# Altium PCB PCB1_Nueva.PcbDoc
Units mil, origin at the board's own origin, x right, y up, seen from the top; angles counter-clockwise.
Board outline 3315 x 2025 mil, 2 copper layers (Top Layer, Bottom Layer); 50 components, 60 nets, 235 pads, 50 vias.
Unrouted connection lines stored in the file: 1.
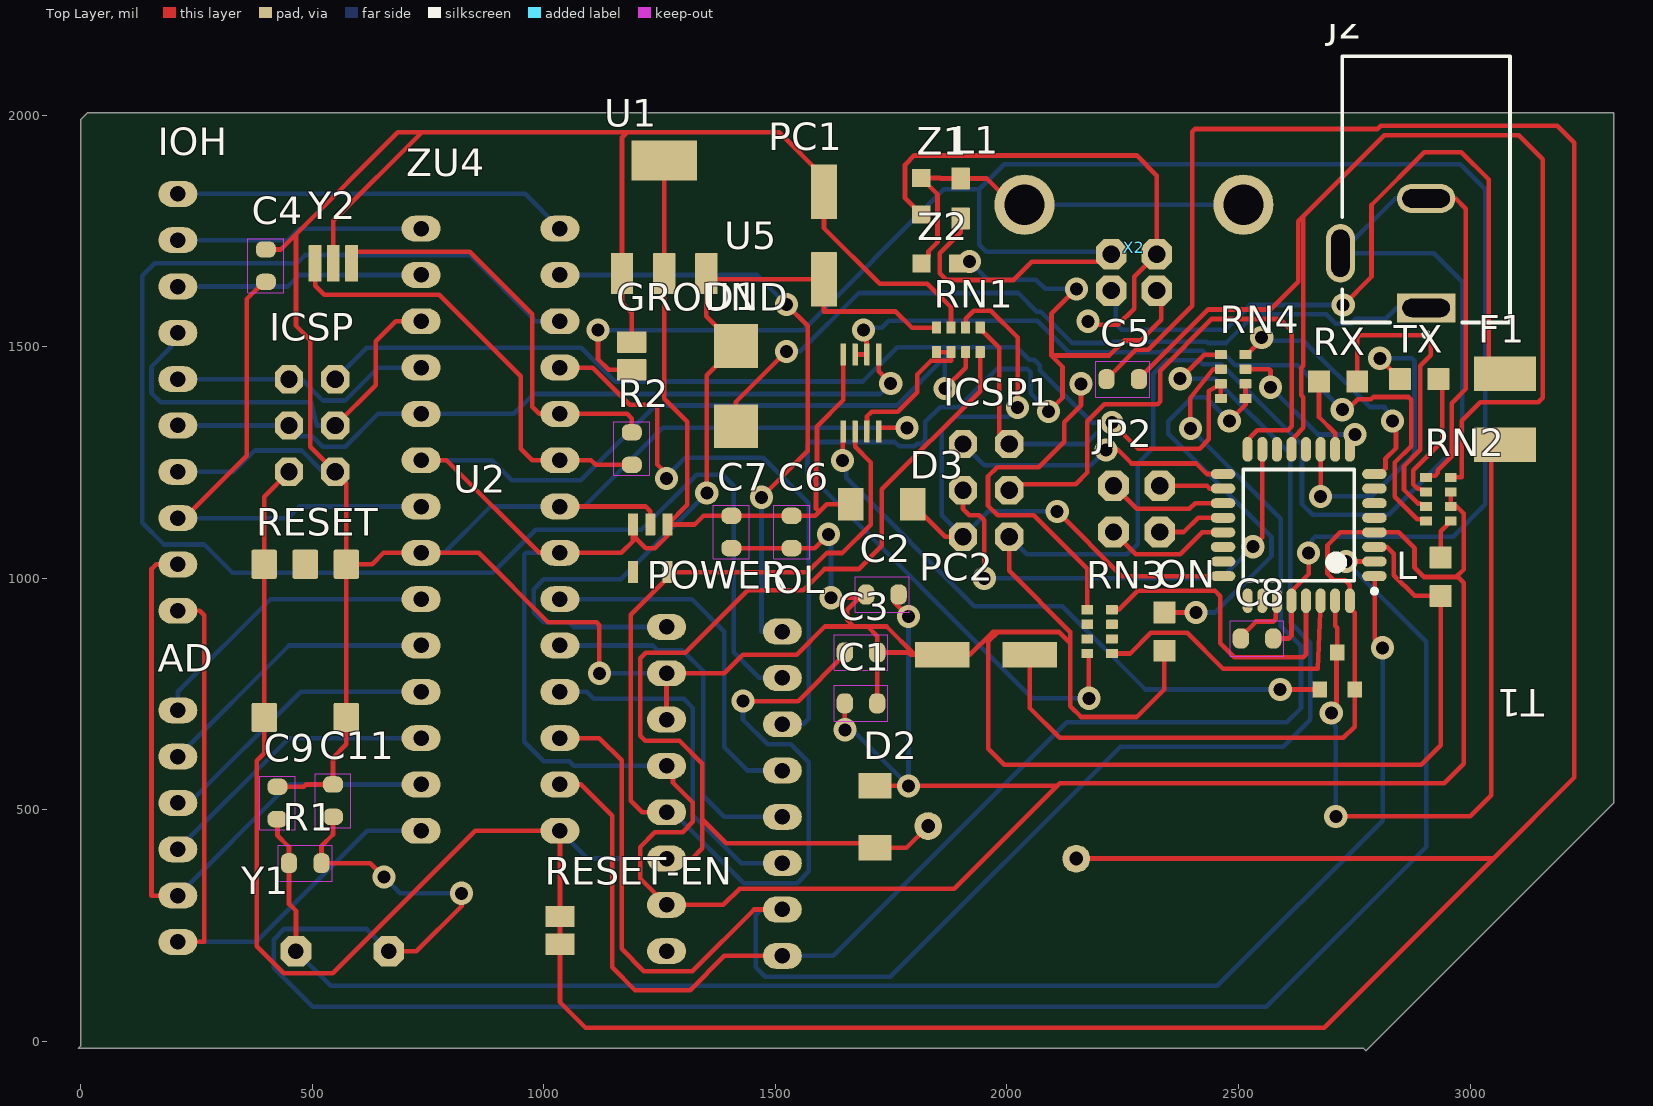
[diagram p0: Top Layer view]
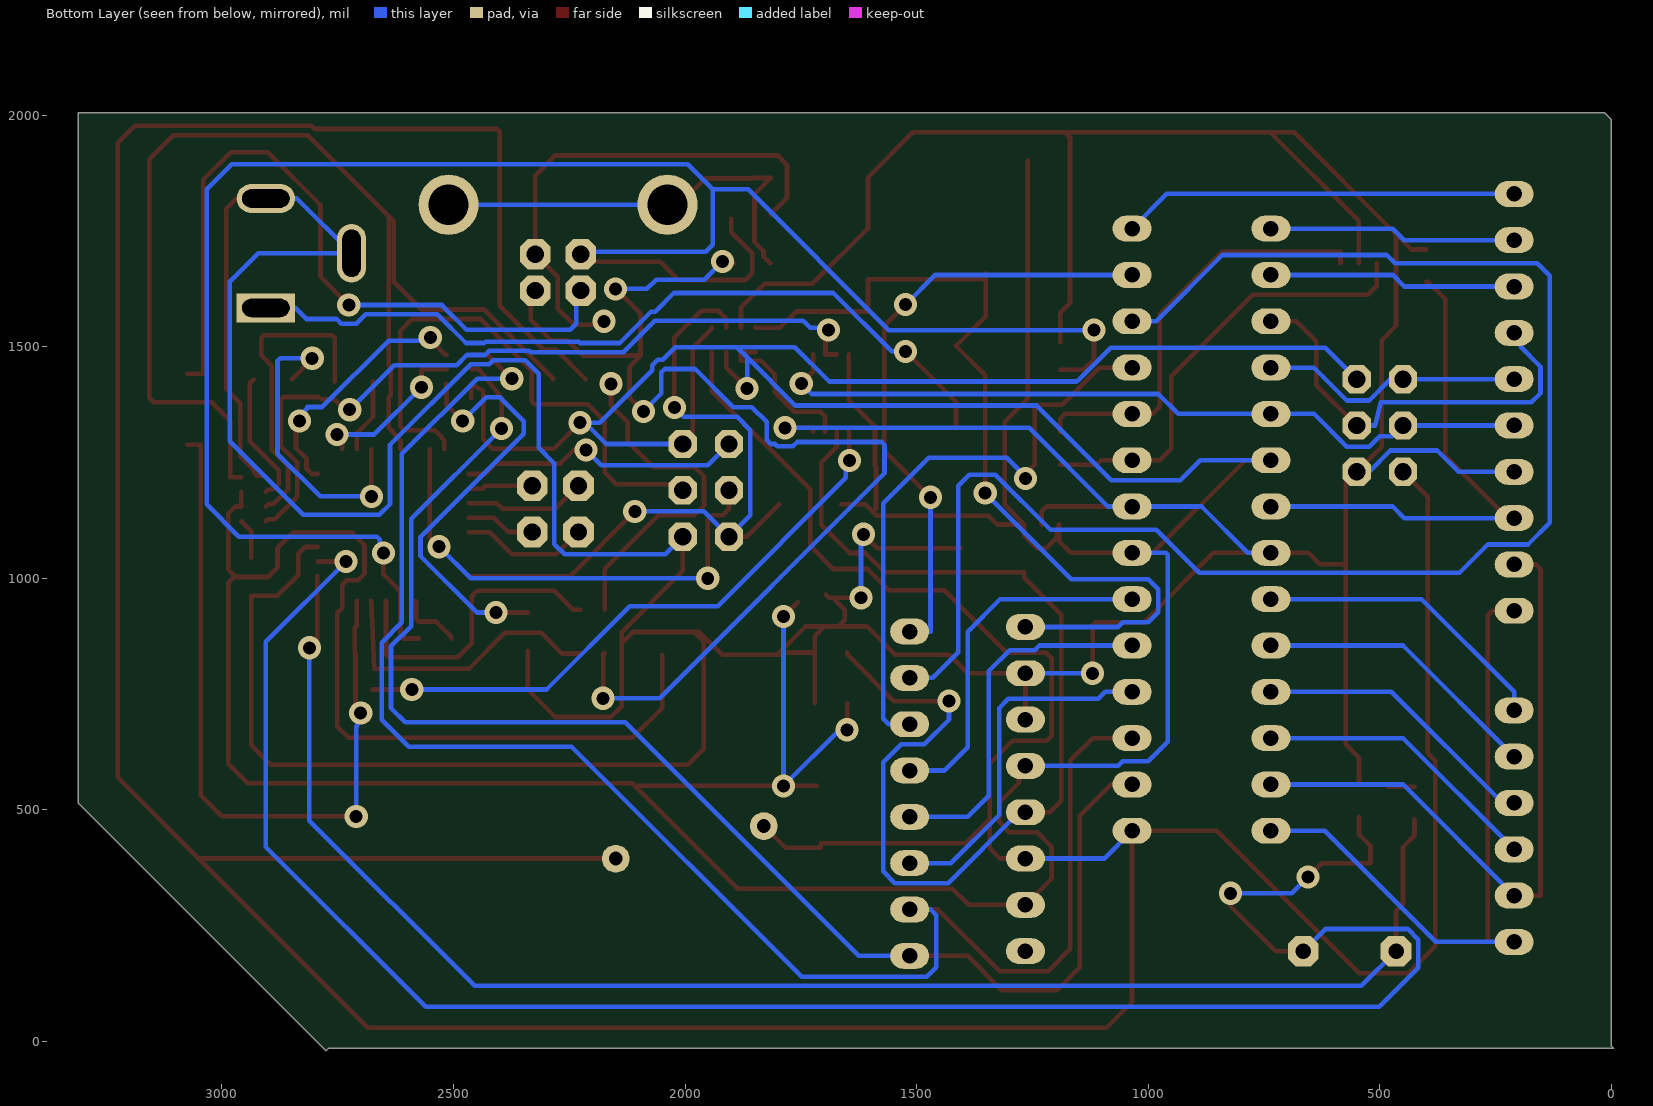
[diagram p1: Bottom Layer view, seen from below]

## Layer stack, top to bottom
Top Solder: solder mask 0.4, Solder Resist, Dk 3.5
Top Layer: signal copper 1.4
Dielectric 1: dielectric 12.6, FR-4, Dk 4.8
Bottom Layer: signal copper 1.4
Bottom Solder: solder mask 0.4, Solder Resist, Dk 3.5

## Board outline
0,-10 0,1990 15,2005 3310,2005 3310,515 2775,-20 2770,-15 -5,-15

## Design rules (kind name [scope] priority, off if disabled: settings)
Clearance [All] p1: gap=10 ignorepadtopadclearanceinfootprint=FALSE
PolygonConnect [All] p1: connectstyle=Relief reliefconductorwidth=10 reliefentries=4 polygonreliefangle="90 Angle" airgapwidth=10
RoutingVias [All] p1: holewidth=28 width=50 viastyle="Through Hole" minholewidth=28 minwidth=50 maxholewidth=28 maxwidth=50
SolderMaskExpansion [All] p1: expansion=0 istentingtop=FALSE
SupplyNets "Schematic Supply Nets_1" [InNet('+5V')] p1: voltage=0.000
SupplyNets "Schematic Supply Nets" [InNet('GND')] p2: voltage=0.000
Width [All] p1: maxlimit=10 minlimit=10 preferedwidth=10
30 further rules are at their usual default settings.

## Components (designator, comment, footprint, x,y, rotation, side; value= is the part's Value field where it differs from the comment)
AD "6x1F-H8.5" 1X06 210,465 r270 top
C1 "100n" C0603-ROUND 1685,730 r180 top
C2 "100n" C0603-ROUND 1730.98,965 r0 top
C3 "1u" C0603-ROUND 1685,840 r180 top
C4 "100n" C0603-ROUND 400,1675 r270 top
C5 "100n" C0603-ROUND 2250,1430 r180 top
C6 "100n" C0603-ROUND 1535,1100 r90 top
C7 "100n" C0603-ROUND 1405,1100 r270 top
C8 "1u" C0603-ROUND 2540,870 r0 top
C9 "22p" C0603-ROUND 425,515 r90 top
C11 "22p" C0603-ROUND 545,520 r90 top
D1 "M7" SMB 1415,1415 r270 top
D2 "CD1206-S01575" MINIMELF 1715,485 r270 top
D3 "CD1206-S01575" MINIMELF 1730,1160 r0 top
F1 "MF-MSMF050-2 500mA" L1812 3075,1365 r90 top
GROUND "SJ" SJ 1190,1480 r270 top
ICSP "3x2 M" 2X03 500,1330 r270 top
ICSP1 "3x2 M" 2X03 1955,1190 r270 top
IOH "10x1F-H8.5" 1X10 210,1380 r270 top
IOL "8x1F-H8.5" 1X08 1515,535 r90 top
J2 "PJ-102A" FP-PJ-102A-MFG 2905,1839.69 r0 top
JP2 "2x2 M - NM" 2X02 2280,1150 r180 top
L "YELLOW" CHIP-LED0805 2936.42,1003.37 r180 top
L1 "BLM21" 0805 1900,1820 r90 top
ON "GREEN" CHIP-LED0805 2340,885 r180 top
PC1 "47u" PANASONIC_D 1605,1740 r270 top
PC2 "47u" PANASONIC_D 1955,835 r0 top
POWER "8x1F-H8.5" 1X08 1265,545 r90 top
R1 "1M" R0603-ROUND 485,385 r0 top
R2 "1M" R0603-ROUND 1190,1280 r90 top
RESET "TS42031-160R-TR-7260" TS42 485,865 r270 top
RESET-EN "SJ" SJ 1035,240 r270 top
RN1 "10K" CAY16 1895,1515 r0 top
RN2 "1K" CAY16 2931.57,1170.75 r90 top
RN3 "22R" CAY16 2200,885 r90 top
RN4 "1K" CAY16 2488.43,1435.75 r270 top
RX "YELLOW" CHIP-LED0805 2715,1425 r90 top
T1 "FDN340P" SOT-23 2714,800 r180 top
TX "YELLOW" CHIP-LED0805 2890,1430 r90 top
U1 "NCP1117ST50T3G" SOT223 1260,1780 r0 top
U2 "LP2985-33DBVR" SOT23-DBV 1230,1065 r180 top
U5 "LMV358IDGKR" MSOP08 1685,1400 r0 top
U$1 "DISCLAIMER" DISCLAIMER 8645,-225 r90 top
X2 "USB-B_TH" PN61729 2274.21,1806.69 r180 top
Y1 "16MHz" QS 565,195 r180 top
Y2 "CSTCE16M0V53-R0 16MHZ" RESONATOR 545.63,1680 r180 top
Z1 "CG0603MLC-05E" CT/CN0603 1815,1825 r90 top
Z2 "CG0603MLC-05E" CT/CN0603 1855,1680 r180 top
ZU4 "ATMEGA328P-PU" DIL28-3 885,1105 r90 top
? "ATmega16U2-AU" 32A_L 2630,1115 r180 top

## Footprints (in the part's own frame and the unit in brackets; to place one, negate y for a bottom-side part, rotate by r counter-clockwise, add the part's x,y. Pads: shape width x height; smd on the part's side, far side on the other; paste and mask are expansions set on the pad)
1X06 [mil]
  oval 56x84 / inner round 0 / far side oval 56x84 hole 33.46: 1(-250,0) 2(-150,0) 3(-50,0) 4(50,0) 5(150,0) 6(250,0)
1X08 [mil]
  oval 56x84 / inner round 0 / far side oval 56x84 hole 33.46: 1(-350,0) 2(-250,0) 3(-150,0) 4(-50,0) 5(50,0) 6(150,0) 7(250,0) 8(350,0)
1X10 [mil]
  oval 56x84 / inner round 0 / far side oval 56x84 hole 33.46: 1(-450,0) 2(-350,0) 3(-250,0) 4(-150,0) 5(-50,0) 6(50,0) 7(150,0) 8(250,0) 9(350,0) 10(450,0)
2X02 [mil]
  oct 66x66 / inner round 0 / far side oct 66x66 hole 37.4: 1(-50,-50) 2(-50,50) 3(50,-50) 4(50,50)
2X03 [mil]
  oct 61.02x61.02 / inner round 0 / far side oct 61.02x61.02 hole 37.4: 1(-100,-50) 2(-100,50) 3(0,-50) 4(0,50) 5(100,-50) 6(100,50)
32A_L [mm] "Thin QFP, 32-Leads, Body 7x7mm, Pitch 0.8mm, IPC High Density"
  oval 1.35x0.55 smd: 1(-4.15,2.8) 2(-4.15,2) 3(-4.15,1.2) 4(-4.15,0.4) 5(-4.15,-0.4) 6(-4.15,-1.2) 7(-4.15,-2) 8(-4.15,-2.8) 17(4.15,-2.8) 18(4.15,-2) 19(4.15,-1.2) 20(4.15,-0.4) 21(4.15,0.4) 22(4.15,1.2) 23(4.15,2) 24(4.15,2.8)
  oval 0.55x1.35 smd: 9(-2.8,-4.15) 10(-2,-4.15) 11(-1.2,-4.15) 12(-0.4,-4.15) 13(0.4,-4.15) 14(1.2,-4.15) 15(2,-4.15) 16(2.8,-4.15) 25(2.8,4.15) 26(2,4.15) 27(1.2,4.15) 28(0.4,4.15) 29(-0.4,4.15) 30(-1.2,4.15) 31(-2,4.15) 32(-2.8,4.15)
  silkscreen extent -4.28,-3.05 3.05,3.75, body extent -3.5,-3.5 3.5,3.5, height 1.2
0805 [mm]
  rrect5% 1.2x1 smd: 1(-1.1,0) 2(1.1,0)
C0603-ROUND [mil]
  rrect80% 35.37x43.31 smd: 1(-35,0) 2(35,0)
  Top Layer keep-out lines w2: 57.99,38.7 -57.99,38.7 -57.99,-38.7 57.99,-38.7 57.99,38.7
CAY16 [mm]
  rrect10% 0.5x0.65 smd: 1(-1.2,-0.675) 2(-0.4,-0.675) 3(0.4,-0.675) 4(1.2,-0.675) 5(1.2,0.675) 6(0.4,0.675) 7(-0.4,0.675) 8(-1.2,0.675)
CHIP-LED0805 [mm]
  rrect4% 1.2x1.2 smd: A(0,-1.05) C(0,1.05)
CT/CN0603 [mm]
  rrect5% 1x1 smd: 1(-1,0) 2(1,0)
DIL28-3 [mil]
  oval 56x84 / inner round 0 / far side oval 56x84 hole 33.46: 1(-650,-150) 2(-550,-150) 3(-450,-150) 4(-350,-150) 5(-250,-150) 6(-150,-150) 7(-50,-150) 8(50,-150) 9(150,-150) 10(250,-150) 11(350,-150) 12(450,-150) 13(550,-150) 14(650,-150) 15(650,150) 16(550,150) 17(450,150) 18(350,150) 19(250,150) 20(150,150) 21(50,150) 22(-50,150) 23(-150,150) 24(-250,150) 25(-350,150) 26(-450,150) 27(-550,150) 28(-650,150)
DISCLAIMER [mil]
FP-PJ-102A-MFG [mm]
  rect 3.2x1.6 hole 1 slot 2.6 at 0 deg paste-2539.97 mask+0: 1(0,-6.5)
  rrect100% 3.2x1.6 hole 1 slot 2.6 at 0 deg paste-2539.97 mask+0: 2(0,-0.5)
  rrect100% 1.6x3.2 hole 2.6 slot 1 at 0 deg paste-2539.97 mask+0: 3(-4.7,-3.5)
  silkscreen extent -4.6,-8.07 4.6,7.3, body extent -5.6,-7.4 4.7,7.4, height 0.25
L1812 [mil]
  rrect2% 74.8x133.86 smd: 1(-76.77,0) 2(76.77,0)
MINIMELF [mil]
  rrect3% 55.12x70.87 smd: A(66.93,0) C(-66.93,0)
MSOP08 [mil]
  rrect16% 11.81x47.24 smd: 1(-38.43,-83.19) 2(-12.83,-83.19) 3(12.76,-83.19) 4(38.35,-83.19) 5(38.35,83.15) 6(12.76,83.15) 7(-12.83,83.15) 8(-38.43,83.15)
PANASONIC_D [mm]
  rrect3% 3x1.4 smd: +(2.4,0) -(-2.4,0)
PN61729 [mil]
  oct 66x66 / inner round 0 / far side oct 66x66 hole 37.4: 1(49.21,185.43) 2(-49.21,185.43) 3(-49.21,106.69) 4(49.21,106.69)
  round 129.91 / inner round 0 / far side round 129.91 hole 86.61: P$1(-236.22,0) P$2(236.22,0)
QS [mil]
  oct 66x66 / inner round 0 / far side oct 66x66 hole 33.46: 1(-100,0) 2(100,0)
R0603-ROUND [mil]
  rrect80% 35.37x43.31 smd: 1(-35,0) 2(35,0)
  Top Layer keep-out lines w2: -57.99,-38.7 57.99,-38.7 57.99,38.7 -57.99,38.7 -57.99,-38.7
RESONATOR [mm]
  rrect7% 0.7x2 smd: 1(-1,0) 2(0,0) 3(1,0)
SJ [mil]
  rrect4% 46x63 smd: 1(-30,0) 2(30,0)
SMB [mil]
  rrect2% 94.49x94.49 smd: A(86.61,0) C(-86.61,0)
SOT23-DBV [mil]
  rrect9% 21.65x47.24 smd: 1(-37.4,-51.18) 2(0,-51.18) 3(37.4,-51.18) 4(37.4,51.18) 5(-37.4,51.18)
SOT223 [mil]
  rrect4% 48x88 smd: 1(-91,-122) 2(0,-122) 3(91,-122)
  rrect2% 141.73x86.61 smd: 4(0,122.01)
SOT-23 [mil]
  rrect6% 31x35 smd: 1(1,-40) 2(-37,40) 3(39,40)
TS42 [mil]
  rrect15% 62.99x55.12 smd: 1(-165.35,88.58) 2(165.35,88.58) 3(-165.35,-88.58) 4(165.35,-88.58)
  rrect15% 62.99x55.12 smd paste+0: 5(-165.35,0)

## Part data
AD: library part PINHD-1X6, "PIN HEADER", DeviceSetName=PINHD-1X6, GateName_1=A, LibraryName=SmartPrj, SymbolName_1=PINHD6
C1 C2 C3 C4 C5 C6 C7 C8 C9 C11: library part C-EU0603-RND, "CAPACITOR, European symbol", DeviceName=0603-RND, DeviceSetName=C-EU, GateName_1=G$1, LibraryName=SmartPrj, SymbolName_1=C-EU
D1: library part DIODE-SMB, "DIODE", DeviceName=SMB, DeviceSetName=DIODE-, GateName_1=G$1, LibraryName=diode, SymbolName_1=D
D2 D3: library part DIODE-MINIMELF, "DIODE", DeviceName=MINIMELF, DeviceSetName=DIODE-, GateName_1=G$1, LibraryName=diode, SymbolName_1=D
F1: library part L-EUL1812, "INDUCTOR, European symbol", DeviceName=L1812, DeviceSetName=L-EU, GateName_1=G$1, LibraryName=rcl, SymbolName_1=L-EU
GROUND RESET-EN: "SMD solder JUMPER", DeviceSetName=SJ, GateName_1=1, LibraryName=jumper, SymbolName_1=SJ
ICSP ICSP1: library part PINHD-2X3, "PIN HEADER", DeviceSetName=PINHD-2X3, GateName_1=A, LibraryName=SmartPrj, SymbolName_1=PINH2X3
IOH: library part PINHD-1X10_ARD, "PIN HEADER", DeviceSetName=PINHD-1X10_ARD, GateName_1=A, LibraryName=SmartPrj, SymbolName_1=PINHD10
IOL POWER: library part PINHD-1X8, "PIN HEADER", DeviceSetName=PINHD-1X8, GateName_1=A, LibraryName=SmartPrj, SymbolName_1=PINHD8
J2: library part CMP-12637-106234071-1, "PJ-102A 2.0 x 6.5 mm, 2.5 A, Horizontal, Through Hole, Tapered Pins, Dc Power Jack Connector", Color=Black, Current Rating=2.5A, Flammability Rating="UL94 V-0", Insulation Resistance=50MΩ, Max Operating Temperature=85°C, Min Operating Temperature=-25°C, Voltage Rating=24V, Contact Gender=Male, Contact Material="Copper, Nickel, Tin", Contact Plating=Nickel, Diameter=2.1mm, Gender=Male, Height=11.2mm, Housing Color=Black, Housing Material=Thermoplastic, Inside Diameter=2mm, Lead Free="Lead Free", Lifecycle Status=Production, Mount="Through Hole", NexarPartId=106234071, Number of Conductors=2, Number of Contacts=3, Orientation=Horizontal, Outside Diameter=6.5mm, Packaging=Bulk, RoHS=Compliant, Schedule B="8536695050, 8536695050", Shielding=No, Termination="Through Hole", Voltage Rating (DC)=24V
JP2: library part PINHD-2X2, "PIN HEADER", DeviceSetName=PINHD-2X2, GateName_1=A, LibraryName=SmartPrj, SymbolName_1=PINH2X2
L ON RX TX: library part LEDCHIP-LED0805, "LED   OSRAM: - CHIPLED LG R971, LG N971, LY N971, LG Q971, LY Q971, LO R971, LY R971 LH N974, LH R974 LS Q976, LO Q976, LY Q976 LO Q996 - Hyper CHIPLED LW Q18S LB Q993, LB Q99A, LB R99A - SideLED LS A670, LO A670, LY A670, LG A670, LP A670 LB A673, LV A673, LT A673, LW A673 LH A674 LY A675 LS A676, LA A676, LO A676, LY A676, LW A676 LS A679, LY A679, LG A679 -  Hyper Micro SIDELEDÂ® LS Y876, LA Y876, LO Y876, LY Y876 LT Y87S - SmartLED LW L88C, LW L88S LB L89C, LB L89S, LG L890 LS L89K, LO L89K, LY L89K LS L896, LA L896, LO L896, LY L896 - TOPLED LS T670, LO T670, LY T670, LG T670, LP T670 LSG T670, LSP T670, LSY T670, LOP T670, LYG T670 LG T671, LOG T671, LSG T671 LB T673, LV T673, LT T673, LW T673 LH T674 LS T676, LA T676, LO T676, LY T676, LB T676, LH T676, LSB T676, LW T676 LB T67C, LV T67C, LT T67C, LS T67K, LO T67K, LY T67K, LW E67C LS E67B, LA E67B, LO E67B, LY E67B, LB E67C, LV E67C, LT E67C LW T67C LS T679, LY T679, LG T679 LS T770, LO T770, LY T770, LG T770, LP T770 LB T773, LV T773, LT T773, LW T773 LH T774 LS E675, LA E675, LY E675, LS T675 LS T776, LA T776, LO T776, LY T776, LB T776 LHGB T686 LT T68C, LB T68C - Hyper Mini TOPLEDÂ® LB M676 - Mini TOPLED SantanaÂ® LG M470 LS M47K, LO M47K, LY M47K    Source: http://www.osram.convergy.de   LUXEON: - LUMILEDÂ® LXK2-PW12-R00, LXK2-PW12-S00, LXK2-PW14-U00, LXK2-PW14-V00 LXK2-PM12-R00, LXK2-PM12-S00, LXK2-PM14-U00 LXK2-PE12-Q00, LXK2-PE12-R00, LXK2-PE12-S00, LXK2-PE14-T00, LXK2-PE14-U00 LXK2-PB12-K00, LXK2-PB12-L00, LXK2-PB12-M00, LXK2-PB14-N00, LXK2-PB14-P00, LXK2-PB14-Q00 LXK2-PR12-L00, LXK2-PR12-M00, LXK2-PR14-Q00, LXK2-PR14-R00 LXK2-PD12-Q00, LXK2-PD12-R00, LXK2-PD12-S00 LXK2-PH12-R00, LXK2-PH12-S00 LXK2-PL12-P00, LXK2-PL12-Q00, LXK2-PL12-R00    Source: www.luxeon.com   KINGBRIGHT:   KA-3528ASYC Source: www.kingbright.com", DeviceName=CHIP-LED0805, DeviceSetName=LED, GateName_1=G$1, LibraryName=led, SymbolName_1=LED
L1: library part WE-CBF_0805, "SMD EMI Suppression Ferrite Beads - excellent anti-EMI properties - low DCR - impedances till 3000 ohms - rated current up to 6 A", DeviceName=_0805, DeviceSetName=WE-CBF, GateName_1=G$1, LibraryName=wuerth-elektronik, SymbolName_1=L
PC1 PC2: library part CPOL-EUD, "POLARIZED CAPACITOR, European symbol", +=+, DeviceName=D, DeviceSetName=CPOL-EU, GateName_1=G$1, LibraryName=rcl, SymbolName_1=CPOL
R1 R2: library part R-EU_R0603, "RESISTOR, European symbol", DeviceName=R0603, DeviceSetName=R-EU_, GateName_1=G$1, LibraryName=SmartPrj, SymbolName_1=R-EU
RESET: library part TS42, "TS42 Dongnan Electronics Tact switch VDC 12V - 50mA", DeviceSetName=TS42, GateName_1=G$1, LibraryName=SmartPrj, SymbolName_1=ST-MOD_V1.4_TS42
RN1 RN2 RN3 RN4: library part 4R-NCAY16, "Array Chip Resistor   Source: RS Component / Phycomp", DeviceName=CAY16, DeviceSetName=4R-N, GateName_1=A, GateName_2=B, GateName_3=C, GateName_4=D, LibraryName=resistor-dil, SymbolName_1=R1NV, SymbolName_2=R1NV, SymbolName_3=R1NV, SymbolName_4=R1NV
T1: library part PMOSSOT23, "MOS FET", DeviceSetName=PMOSSOT23, GateName_1=A, LibraryName=zetex, SymbolName_1=P_MOSFET
U1: library part MC33269ST*, "Adjustable Output Low Dropout Voltage Regulator 800 mA   Source: http://www.onsemi.com/pub/Collateral/MC33269-D.PDF", DeviceSetName=MC33269ST*, GateName_1=G$1, LibraryName=linear, SymbolName_1=VREG-O2
U2: library part LP2985-XXDBVR, "ULTRALOW-POWER 50-mA LOW-DROPOUT LINEAR REGULATORS   50-mA Low-Dropout Regulator Source: http://focus.ti.com/lit/ds/symlink/tps77001.pdf", DeviceSetName=LP2985-XXDBVR, GateName_1=G$1, LibraryName=SmartPrj, SymbolName_1=LP2985-XXDBVR
U5: library part LMV358?*MM, "Dual General Purpose, Low Voltage, Rail-to-Rail Output Operational Amplifiers   Source: http://www.national.com/mpf/LM/LMV321.html http://www.national.com/dt/lmv_qual.pdf", DeviceName=MM, DeviceSetName=LMV358?*, GateName_1=A, GateName_2=B, GateName_3=P, LibraryName=linear, SymbolName_1=OPAMP, SymbolName_2=OPAMP, SymbolName_3=PWR+-, V+=V+, V-=V-
X2: library part PN61729, "BERG USB connector", DeviceSetName=PN61729, GateName_1=G$1, LibraryName=SmartPrj, SymbolName_1=J11, USB=USB
Y1: library part XTAL/S, "CRYSTAL", DeviceSetName=XTAL/S, GateName_1=G$1, LibraryName=SmartPrj, SymbolName_1=XTAL
Y2: library part RESONATORMU, DeviceName=MU, DeviceSetName=RESONATOR, GateName_1=G$1, LibraryName=SmartPrj, SymbolName_1=RESONATOR
Z1 Z2: library part VARISTORCN0603, "VARISTOR", DeviceName=CN0603, DeviceSetName=VARISTOR, GateName_1=G$1, LibraryName=varistor, SymbolName_1=VARISTOR
ZU4: "MICROCONTROLLER   4 Kbytes FLASH   128 bytes SRAM   256 bytes EEPROM   UART   6-channel 10 bit ADC", DeviceName=PU, DeviceSetName=ATMEGA328P-, GateName_1=G$1, LibraryName=SmartPrj, SymbolName_1=20-I/O-2
?: library part CMP-0095-00303-3, "8-bit AVR Microcontroller, 2.7-5.5V, 16KB Flash, 512 Bytes EEPROM, 512 Bytes SRAM, 32-pin TQFP, Industrial Grade (-40°C to 85°C)", Code_JEDEC=MS-026-ABA, ComponentLink1Description="Manufacturer URL", ComponentLink1URL=http://www.atmel.com/, ComponentLink2Description="ATmega8U2/16U2/32U2 Datasheet", ComponentLink2URL=http://www.atmel.com/dyn/resources/prod_documents/doc7799.pdf, ComponentLink3Description="ATmega8U2/16U2/32U2 Summary", ComponentLink3URL=http://www.atmel.com/dyn/resources/prod_documents/7799S.pdf, DatasheetVersion="revD, Nov-2010", PackageDescription="32-Lead, 7x7x1.0 mm Body, 0.8mm Lead Pitch, Thin Profile Plastic Quad Flat Package (TQFP)", PackageReference=32A, PackageVersion="revC, Oct-2010", PartNumber=ATmega16U2-AU, RevisionNote="Schematic symbol corrected"
U$1: ARDUINOisaregisteredtrademark.="ARDUINO is a registered trademark.", Arduinomaymakechangestospecificationsandproductdescriptionsatanytime,withoutnotice.TheCustomermustnot="Arduino may make changes to specifications and product descriptions at any time, without notice. The Customer must not", DeviceSetName=DISCLAIMER, GateName_1=G$1, LibraryName=SmartPrj, ReferenceDesignsAREPROVIDED"ASIS"AND"WITHALLFAULTS.ArduinoDISCLAIMSALLOTHERWARRANTIES,EXPRESSORIMPLIED,="Reference Designs ARE PROVIDED \"AS IS\" AND \"WITH ALL FAULTS. Arduino DISCLAIMS ALL OTHER WARRANTIES, EXPRESS OR IMPLIED,", REGARDINGPRODUCTS,INCLUDINGBUTNOTLIMITEDTO,ANYIMPLIEDWARRANTIESOFMERCHANTABILITYORFITNESSFORAPARTICULARPURPOSE="REGARDING PRODUCTS, INCLUDING BUT NOT LIMITED TO, ANY IMPLIED WARRANTIES OF MERCHANTABILITY OR FITNESS FOR A PARTICULAR PURPOSE", relyontheabsenceorcharacteristicsofanyfeaturesorinstructionsmarked"reserved"or"undefined."Arduinoreserves="rely on the absence or characteristics of any features or instructions marked \"reserved\" or \"undefined.\" Arduino reserves", SymbolName_1=DISCLAIMER, TheproductinformationontheWebSiteorMaterialsissubjecttochangewithoutnotice.Donotfinalizeadesignwiththisinformation.="The product information on the Web Site or Materials is subject to change without notice. Do not finalize a design with this information.", theseforfuturedefinitionandshallhavenoresponsibilitywhatsoeverforconflictsorincompatibilitiesarisingfromfuturechangestothem.="these for future definition and shall have no responsibility whatsoever for conflicts or incompatibilities arising from future changes to them."

## Free pads (board coordinates)
  round 60 hole 30: 2(1830,465) 2(2149.59,394.7)

## Via types
v1: diameter 50, hole 28, Top Layer to Bottom Layer, 50 vias

## Nets (pads, with @x,y where several pads share a name; then routed paths per layer and width w, separated by ;. In a path a pad name is that pad's centre, name@x,y a point inside that pad or via, vN(x,y) a via of type N, cw(c..) or ccw(c..) an arc to the next point about the centre after c; other vN are vias at no path point)
+3V3: C3.2 POWER.4 U2.5 U5.2 | length 2412.2
  Top Layer w10: POWER.4 1213,495 1188,520 1188,921.6 1267.4,1001 U2.5@1267.4,1013 ; U2.5 U2.5@1267.4,1013 ; v1(1430.19,735) 1548.97,735 1650,836.03 C3.2 ; U5.2 1672.17,1283.83 1706,1250 1706,1116 1644.67,1054.67 1610.94,1054.67 1569.27,1013 U2.5@1267.4,1013
  Bottom Layer w10: POWER.4 1279,495 1432,342 1546.81,342 1572,367.19 1572,602.81 1532.81,642 1483.19,642 1430.19,695 v1(1430.19,735)
+5V: ?.4 ?.32 C1.2 C2.2 C6.2 C7.1 D2.C D3.C ICSP1.2 ICSP.2 PC2.+ POWER.2 POWER.5 RN1.3 RN1.5 RN2.2 RN2.3 RN4.3 RN4.4 T1.2 U1.2 U1.4 U2.1 U2.3 U5.8 ZU4.7 ZU4.20 | length 12944.6
  Top Layer w10: ZU4.20 790,1255 990,1055 ZU4.7 1167.6,1055 1192.6,1080 U2.3 1198.8,1086.2 1220,1065 1240,1065 1267.4,1092.4 U2.1 ; U1.4 U1.2 1260,1388 1310,1338 1310,1158.78 U2.1 ; POWER.5 1279,595 1279,559 1322,516 1322,474 1300,452 1240,452 1208,420 1208,352 POWER.2 1387.52,295 1422.68,330.16 1886.54,330.16 2108.31,551.93 ; U5.8 1646.57,1384.96 1590,1328.39 1590,1243.69 1587.72,1241.41 1587.72,1150.86 1593.57,1145 1596,1145 ; v1(1650,673) C1.2 ; D3.C 1611,1160 1596,1145 ; D2.C v1(1787.5,551.93) 2108.31,551.93 ; C2.2@1756.77,948.23 v1(1787.5,917.5) ; v1(1866,1410) 1910.75,1454.75 RN1.3 ; RN1.5 1942.24,1539 1983,1498.24 1983,1312 ICSP1.2 ; PC2.+ 2049.49,720 2113.98,655.51 2726.51,655.51 2751,680 T1.2 2751,925.24 2740.24,936 ?.32 2740.24,985.76 2730,996 2706,996 2692,1010 2692,1071.25 2720,1099.25 ?.4 2845.71,1099.25 2880,1064.97 2880,1023 2900,1003 2970,1003 ; v1(2227,1336) 2283,1280 2416,1280 2436,1300 2436,1404 RN4.3 RN4.4 ; RN2.3 RN2.2 2971,1155 2986,1140 2986,1019 2970,1003 ; U2.1 1326,1116.18 1344.82,1135 C7.1 C6.2 1586,1135 1596,1145 ; 2108.31,551.93 2114.17,557.79 2943.79,557.79 2986,600 2986,990 2973,1003 2970,1003
  Bottom Layer w10: ICSP.2 618,1498 1081,1498 1151.07,1427.93 1154,1425 1689,1425 1763,1499 1888,1499 ; ZU4.20 888,1255 931,1212 1080,1212 1241,1373 1762,1373 1866,1477 ; ZU4.7 962,1055 958,1051 958,647 1000,605 1055,605 1065,595 POWER.5 ; v1(1650,673) 1666.43,673 v1(1787.5,551.93) v1(1787.5,917.5) ; v1(1866,1410) 1866,1477 ; ICSP1.2 2169.97,1290 2196.97,1317 2197.18,1317 v1@2216.18,1336 ; v1(2227,1336) v1@2216.18,1336 ; 1866,1477 1888,1499 ; 1888,1499 2021,1499 2048,1472 2059.28,1472 2071,1460.28 2071,1449 2184,1336 v1@2216.18,1336
AD0: AD.1 ZU4.23 | length 647.8
  Bottom Layer w10: AD.1 210,755 410,955 ZU4.23
AD1: AD.2 ZU4.24 | length 624.4
  Bottom Layer w10: AD.2 450,855 ZU4.24
AD2: AD.3 ZU4.25 | length 624.4
  Bottom Layer w10: AD.3 235,515 475,755 ZU4.25
AD3: AD.4 ZU4.26 | length 624.4
  Bottom Layer w10: AD.4 450,655 ZU4.26
AD4/SDA: AD.5 IOH.9 ZU4.27 | length 1447.6
  Top Layer w10: AD.5 153,315 153,1020 163,1030 IOH.9
  Bottom Layer w10: AD.5 450,555 ZU4.27
AD5/SCL: AD.6 IOH.10 ZU4.28 | length 1447.6
  Top Layer w10: AD.6 267,215 267,920 257,930 IOH.10
  Bottom Layer w10: AD.6 379,215 619,455 ZU4.28
AREF: C4.2 IOH.8 ZU4.21 | length 1134.6
  Top Layer w10: IOH.8 224,1130 359.07,1265.07 359.07,1603.04 396.03,1640 C4.2
  Bottom Layer w10: IOH.8 447,1130 472,1155 ZU4.21
CMP: RN1.1 RN1.2 U5.3 | length 336.8
  Top Layer w10: U5.3 1697.76,1350 1707.76,1360 1764.53,1360 1806.37,1401.84 1806.37,1440 1836.1,1469.73 1879.25,1469.73 RN1.2 RN1.1
D+: RN3.5 X2.3 Z1.1 | length 1874.5
  Top Layer w10: Z1.1 1780,1820.63 1780,1893 1800,1913 2280,1913 2323.42,1869.58 X2.3 2274.58,1651.16 2274.58,1582.29 2239.64,1547.35 2182.65,1547.35 v1(2175,1555) ; v1(2160,1420) 2160,1373.43 2123.69,1337.12 2123.69,1295 2068.69,1240 1979,1240 1959,1220 1959,1157 1980,1136 2057.73,1136 2173,1020.73 2173,932.24 RN3.5
D-: RN3.8 X2.2 Z2.1 | length 2556.6
  Top Layer w10: Z2.1 1898.37,1684 v1(1919.43,1684) ; v1(2090,1360) 2120,1390 2120,1457.17 2096.09,1481.09 ; v1(2150,1625) 2096.09,1571.09 2096.09,1481.09 ; RN3.8 2177,837.76 v1(2177,741) ; 2333.42,1586.26 2333.42,1558.42 2288.36,1513.36 2253.36,1513.36 2221.09,1481.09 2096.09,1481.09
  Bottom Layer w10: v1(1919.43,1684) 1958.43,1645 2062.38,1645 2082.38,1625 2140.86,1625 2150,1634.14 v1(2150,1625) ; v1(2090,1360) 2051,1399 2051,1445.14 2044.14,1452 1978,1452 1895.73,1369.73 1855.73,1369.73 1824,1338 1824,1299 1815,1290 1805.57,1290 1800.57,1285 1767.43,1285 1758.03,1294.4 1575.26,1294.4 1569.4,1288.55 1569.4,1226.6 2055,741 v1(2177,741)
DTR: ?.13 C5.1 RN2.4 | length 2564
  Top Layer w10: C5.1 2285,1430.72 2434.78,1580.5 2569.5,1580.5 2629,1640 2629,1771 2640,1782 ; ?.13 2614.25,1297.29 2619.92,1302.96 2619.92,1304.83 2640,1324.91 2640,1390.76 2635.04,1395.72 2635.04,1454.28 2640,1459.24 2640,1782 ; RN2.4 2982,1217.99 2982,1340 3022,1380 3147,1380 3157,1390 3157,1905 3105,1957 2815,1957 2640,1782
GATE_CMD: T1.3 U5.1 | length 1315.2
  Top Layer w10: v1(1645.03,1254.4) 1645.8,1255.18 1645.8,1316.04 U5.1 ; v1(2590,760) T1.3
  Bottom Layer w10: v1(1645.03,1254.4) 1652.68,1246.75 1652.68,1217.03 1929.71,940 2119.14,940 2299.14,760 v1(2590,760)
GND: ?.3 C1.1 C2.1 C3.1 C4.1 C6.1 C7.2 C9.2 C11.2 GROUND.1 ICSP1.6 ICSP.6 IOH.7 J2.2 J2.3 L.C ON.C PC1.- PC2.- POWER.6 POWER.7 RESET.1 RESET.2 RN1.7 RN2.5 U1.1 U2.2 U5.4 Y2.2 ZU4.8 ZU4.22 | length 14402.5
  Top Layer w10: C4.1 432,1710 465,1743 ; C9.2 482,550 487,555 C11.2 545,613 573.58,641.58 RESET.2 RESET.1 ; Y2.2 545.63,1771.63 737,1963 ; ZU4.8 1220,1155 1230,1145 U2.2 ; v1(1120,795) 1120,899.14 1114.14,905 1009.14,905 859.14,1055 ZU4.22 654,1055 629.35,1030.35 RESET.1 ; GROUND.1 1190,1573 1169,1594 U1.1 1169,1952 1180,1963 ; POWER.6 POWER.7 1390,795 1430,835 1546,835 1607,896 1669,896 ; C7.2 C6.1 1585,1065 v1(1615,1095) ; v1(1620,958.06) 1689.04,958.06 C2.1 ; 1676.64,953.36 1655,931.72 1655,910 1669,896 ; C1.1 C3.1 ; U5.4 1723.35,1325 v1(1784,1325) ; RN1.7 1879.25,1585 1828.25,1636 1725,1636 1605,1756 PC1.- 1605,1866 1508,1963 1180,1963 ; ICSP1.6 2005,1016 2137,884 2137,860 ; ON.C 2340,760 2280.59,700.59 2160,700.59 2137,723.59 2137,860 ; ?.3 2820.24,1067.76 2834.96,1053.04 2834.96,1007.07 2880,962.03 L.C 2936.42,640 2894.28,597.86 1994.14,597.86 1960,632 1960,864 1980,884 ; RN2.5 2908.79,1221.78 2924.49,1221.78 2930.34,1227.64 2930.34,1233.47 2960,1263.13 2960,1378 2990.69,1408.69 2990.69,1798.31 2969,1820 J2.2 ; 465,1743 685,1963 737,1963 ; 465,1743 465,1545 496,1514 496,1284 ICSP.6 573.58,1206.42 RESET.1 ; 737,1963 1180,1963 ; 1669,896 1699,896 ; 1699,896 1740,896 1801,835 ; 1699,896 1720,875 C3.1 ; C3.1 1787,840 1792,835 1801,835 ; 1801,835 PC2.- 1920,835 1969,884 1980,884 ; 1980,884 2113,884 2137,860
  Bottom Layer w10: IOH.7 330,1230 376,1276 477,1276 523,1230 ICSP.6 ; ZU4.22 785,1055 885,1155 ZU4.8 1087,1155 1257,1325 v1(1784,1325) ; v1(1120,795) POWER.7 ; v1(1615,1095) 1620,1115 v1(1620,958.06) ; ICSP1.6 2043,1052 2260,1052 2282,1074 2282,1248 2316,1282 2316,1442 2345,1471 2414,1471 2422.76,1462.24 2462.76,1462.24 2637,1288 2637,1160 2660,1137 2824,1137 2983,1296 2983,1640 2921.11,1701.89 J2.3 2838.07,1820 J2.2
IO0: IOL.1 RN4.2 ZU4.2 | length 3091.8
  Top Layer w10: ZU4.2 1080,555 1148,487 1148,160 1197,111 1316,111 1390,185 IOL.1 ; v1(2396,1323.52) 2396,1389 2445.5,1451.5 RN4.2
  Bottom Layer w10: IOL.1 1625,185 2129,689 2604,689 2635,720 2635,853 2591.26,896.74 2591.26,1128.26 v1(2396,1323.52)
IO1: IOL.2 RN4.1 ZU4.3 | length 3597.7
  Top Layer w10: ZU4.3 1120,655 1168,607 1168,200 1216,152 1321,152 1454,285 IOL.2 ; v1(2374,1431) 2425.99,1482.99 RN4.1
  Bottom Layer w10: IOL.2 1470,285 1458,273 1458,160 1478,140 1748.39,140 2245.11,636.72 2596.72,636.72 2655,695 2655,861.28 2611.26,905.02 2611.26,1268.74 2449,1431 v1(2374,1431)
IO2: IOL.3 ZU4.4 | length 768.6
  Bottom Layer w10: ZU4.4 1093,755 1108,740 1302,740 1322,720 1322,489 1426,385 IOL.3
IO3: IOL.4 ZU4.5 | length 790.8
  Bottom Layer w10: ZU4.5 1235,855 1245,845 1299,845 1344,800 1344,531 1390,485 IOL.4
IO4: IOL.5 ZU4.6 | length 779.7
  Bottom Layer w10: ZU4.6 1320,955 1390,885 1390,635 1440,585 IOL.5
IO5: IOL.6 ZU4.11 | length 1303.3
  Top Layer w10: ZU4.11 1106,1455 1186,1375 1239.14,1375 1245,1369.14 1245,1245.82 1264.72,1226.11 v1(1264.72,1215.28)
  Bottom Layer w10: v1(1264.72,1215.28) 1264.72,1219.72 1305,1260 1473.65,1260 1572,1161.65 1572,697 1560,685 IOL.6
IO6: IOL.7 ZU4.12 | length 3420.1
  Bottom Layer w10: ZU4.12 983,1555 840,1698 485,1698 467,1680 160,1680 133,1653 133,1120 180,1073 267,1073 328,1012 890,1012 983,1105 1211,1105 1330,1224 1386,1224 1410,1200 1410,840 1465,785 IOL.7
IO7: IOL.8 ZU4.13 | length 1327
  Top Layer w10: v1(1470,1175) 1570,1275 1570,1545 v1(1524,1591)
  Bottom Layer w10: ZU4.13 1460,1655 v1(1524,1591) ; v1(1470,1175) 1470,885 IOL.8
IO8: IOH.1 ZU4.14 | length 856.1
  Bottom Layer w10: IOH.1 960,1830 ZU4.14
IO9: IOH.2 ZU4.15 | length 535.4
  Bottom Layer w10: IOH.2 447,1730 472,1755 ZU4.15
L13: RN2.8 U5.6 U5.7 | length 1681.8
  Top Layer w10: U5.7 U5.6 1696.86,1484.06 1696.86,1529.15 v1(1690,1536) ; v1(2724,1364) 2734.82,1364 2757.2,1386.38 2785.62,1386.38 2790.62,1391.38 2866.86,1391.38 2872.72,1385.52 2872.72,1285.55 2837.2,1250.04 2837.2,1176.3 2885.86,1127.64 2900.87,1127.64 RN2.8
  Bottom Layer w10: v1(1690,1536) 1694.76,1540.76 1730,1540.76 1745,1555.76 2065.24,1555.76 2133,1488 2333.72,1488 2336.72,1491 2422.28,1491 2431.05,1482.24 2471.05,1482.24 2493.28,1460 2628,1460 v1(2724,1364)
M8RXD: ?.9 RN4.7 | length 353.1
  Top Layer w10: RN4.7 2566.5,1451.5 2569,1449 v1(2569,1412.57) ; ?.9 2740.24,1299.42 v1(2751.48,1310.66)
  Bottom Layer w10: v1(2569,1412.57) 2670.9,1310.66 v1(2751.48,1310.66)
M8TXD: ?.8 RN4.8 | length 562.2
  Top Layer w10: RN4.8 2517.95,1482.99 2550,1515.04 v1(2550,1520) ; ?.8 2805.98,1225.24 2817.2,1236.46 2817.2,1258.32 2840,1281.12 2840,1332.72 v1(2832.72,1340)
  Bottom Layer w10: v1(2550,1520) 2557,1513 2640,1513 2783,1370 2815,1370 2815,1368.54 2832.72,1350.82 v1(2832.72,1340)
MISO: ICSP.1 IOH.5 ZU4.18 | length 573.5
  Bottom Layer w10: IOH.5 ICSP.1 477,1430 523,1384 571,1384 642,1455 ZU4.18
MISO2: ?.17 ICSP1.1 | length 615.8
  Top Layer w10: v1(2213.54,1277) 2240,1277 2269,1248 2409,1248 2431.76,1225.24 ?.17
  Bottom Layer w10: ICSP1.1 1951,1244 2180.54,1244 v1(2213.54,1277)
MOSI: ICSP.4 IOH.4 ZU4.17 | length 940.4
  Top Layer w10: ICSP.4 637,1417 637,1512 680,1555 ZU4.17
  Bottom Layer w10: IOH.4 196,1530 196,1500 153,1457 153,1400 173,1380 498,1380 510,1330 ICSP.4
MOSI2: ?.16 ICSP1.4 | length 1211.6
  Top Layer w10: ICSP1.4 2018.18,1203.18 2148.18,1203.18 2173.54,1228.54 2173.54,1339.1 2210.43,1376 2325.14,1376 2331,1381.86 2331,1448.43 2442.57,1560 2589,1560 2615,1534 2615,1328.19 2606.77,1319.96 2593.45,1319.96 2572.06,1319.96 2561.96,1319.96 2540.56,1319.96 2525.43,1304.83 2525.43,1302.96 2519.76,1297.29 ?.16
NetL_A: L.A RN2.1 | length 87.8
  Top Layer w10: L.A 2936.42,1101.79 RN2.1
NetON_A: ON.A RN4.5 RN4.6 | length 934.1
  Top Layer w10: ON.A v1(2408.34,926.34) ; v1(2480,1340) 2515,1375 RN4.5 RN4.6
  Bottom Layer w10: v1(2408.34,926.34) 2449.34,926.34 2571.26,1048.26 2571.26,1088.74 2348,1312 2348,1339 2400,1391 2429,1391 v1(2480,1340)
NetRN2_6: RN2.6 TX.A | length 291.5
  Top Layer w10: RN2.6 2900.16,1191.35 2893.15,1191.35 2891.35,1193.15 2886.57,1193.15 2877.2,1202.51 2877.2,1233.47 2940,1296.27 2940,1421.34 TX.A
NetRN2_7: RN2.7 RX.A | length 672.4
  Top Layer w10: RX.A 2756.34,1519.14 2762.2,1525 2909.14,1525 2915,1519.14 2915,1481.56 2892.72,1459.28 2892.72,1277.27 2857.2,1241.76 2857.2,1191.02 2886.57,1161.66 2891.35,1161.66 2893.16,1159.85 2900.16,1159.85 RN2.7
PB4: ?.18 JP2.1 | length 139.2
  Top Layer w10: JP2.1 2431.87,1200 2438.13,1193.74 ?.18
PB5: ?.19 JP2.3 | length 262.4
  Top Layer w10: JP2.3 2280,1150 2394,1150 2406.24,1162.24 ?.19
PB6: ?.20 JP2.2 | length 149.4
  Top Layer w10: JP2.2 2382,1100 2412.75,1130.75 ?.20
PB7: ?.21 JP2.4 | length 276.1
  Top Layer w10: JP2.4 2278,1052 2374,1052 2421.25,1099.25 ?.21
PWRIN: D1.A J2.1 | length 1735.1
  Top Layer w10: D1.A 1415,1381 v1(1524,1490)
  Bottom Layer w10: v1(1524,1490) 1554,1490 1680,1616 2024,1616 2064.24,1575.76 2073.52,1575.76 2141.28,1508 2227,1508 2230,1511 2430.57,1511 2433.57,1508 2473,1508 2535,1570 2689.43,1570 2709.43,1550 2742.57,1550 2752.57,1560 2818.15,1560 2841.93,1583.78 J2.1
RD+: ?.29 RN3.4 | length 672.8
  Top Layer w10: RN3.4 2241.24,932.24 2282,973 2449.14,973 2460.86,961.28 2460.86,860 2490.86,830 2639.89,830 2645.75,835.86 ?.29
RD-: ?.30 RN3.1 | length 642
  Top Layer w10: RN3.1 2266.2,837.76 2310.72,882.28 2389.14,882.28 2466.42,805 2671.39,805 ?.30
RESET: C5.2 D2.A ICSP.5 pad.2 POWER.3 RESET-EN.1 RESET-EN.2 RESET.3 RESET.4 RN1.4 ZU4.1 | length 10926.8
  Top Layer w10: ICSP.5 396.42,1176.42 RESET.3 RESET.4 396.42,622.42 380,606 380,206 439,147 544,147 852,455 ZU4.1 RESET-EN.1 RESET-EN.2 1035,85 1090,30 2685,30 3050,395 ; POWER.3 1320,395 1342,417 1342,480 ; pad.2@1830,465 1783.07,418.07 D2.A 1707,418.07 1707,428 1394,428 1342,480 ; RN1.4 1942.24,1404.24 1730,1192 1730,1070 1680,1020 1606,1020 1560,974 1440,974 1305,839 1220,839 1208,827 1208,660 1219,649 1293,649 1342,600 1342,480 ; pad.2@2149.59,394.7 2149.7,394.7 2150,395 3050,395 ; C5.2 2278.36,1493.36 2305.06,1493.36 2400,1588.3 2400,1964.14 2405.86,1970 2799.72,1970 2806.72,1977 3188,1977 3225,1940 3225,570 3050,395
  Bottom Layer w10: ZU4.1 1095,395 POWER.3
RESET2: ?.24 D3.A ICSP1.5 RN1.6 | length 1525.6
  Top Layer w10: D3.A 1866.93,1090 ICSP1.5 ; RN1.6 1910.75,1560 1928.75,1578 1965,1578 2023,1520 v1(2023,1368.99) ; v1(2108.51,1144.49) 2248.24,1004.76 ?.24
  Bottom Layer w10: v1(2023,1368.99) 2002.62,1348.62 1887.62,1348.62 1859,1320 1859,1136 ICSP1.5 1959.49,1144.49 v1(2108.51,1144.49)
RXLED: ?.10 RX.C | length 161.1
  Top Layer w10: RX.C 2673.66,1348.34 2708.74,1313.26 ?.10
SCK: ICSP.3 IOH.6 U5.5 ZU4.19 | length 1687.6
  Top Layer w10: U5.5 1723.35,1446.65 v1(1749,1421)
  Bottom Layer w10: IOH.6 ICSP.3 473.14,1306.86 500.14,1306.86 523,1284 571,1284 642,1355 ZU4.19 935,1355 978,1398 1726,1398 v1(1749,1421)
SCK2: ?.15 ICSP1.3 | length 1048.3
  Top Layer w10: ICSP1.3 1905,1150 1919,1136 1940,1136 1951,1125 v1(1951,1000) ; v1(2531.26,1068.26) 2551.26,1088.26 ?.15
  Bottom Layer w10: v1(1951,1000) 2463,1000 v1(2531.26,1068.26)
SS: IOH.3 ZU4.16 | length 535.4
  Bottom Layer w10: IOH.3 447,1630 472,1655 ZU4.16
TP_VUCAP: ?.27 C8.1 | length 135.5
  Top Layer w10: C8.1 2505,873.97 2537.69,906.66 2574.67,906.66 2580.53,912.51 2580.53,949.38 ?.27
TXLED: ?.11 TX.C | length 682.9
  Top Layer w10: v1(2677.24,1177) ?.11 ; v1(2805,1475) 2808,1472 2808,1470.66 TX.C
  Bottom Layer w10: v1(2677.24,1177) 2787.97,1177 2880,1269.03 2880,1469.14 2874.14,1475 v1(2805,1475)
UGND: ?.28 C8.2 GROUND.2 L1.1 X2.4 | length 4538
  Top Layer w10: v1(1117,1536) 1117,1473 1140,1450 GROUND.2 ; L1.1 1900,1747 1855,1702 1855,1659 1870,1644 2014,1644 2053.74,1683.74 X2.4@2226.58,1683.74 ; C8.2 2608.39,870 2614.25,875.86 ?.28 2614.25,970.52 2619.92,976.18 2619.92,978.06 2651.26,1009.4 v1@2651.26,1050 ; v1@2646,1055.26 2651,1055.26 v1(2651.26,1055)
  Bottom Layer w10: v1(1117,1536) 1560,1536 1864,1840 1940,1840 ; X2.4@2234.83,1705 1955,1705 1940,1720 1940,1840 ; v1(2651.26,1055) 2658.91,1062.65 2658.91,1083.91 2665.14,1090.14 2963.14,1090.14 3033,1160 3033,1840 2979,1894 1994,1894 1940,1840
USBVCC: ?.31 F1.1 T1.1 | length 1622.2
  Top Layer w10: v1(2700.27,709.13) 2702.64,711.5 2711.5,711.5 2711.5,838.5 T1.1 2713,893 2708.74,897.26 ?.31 ; v1(2710,486) 3000,486 3046,532 3046,1288.23 F1.1
  Bottom Layer w10: v1(2700.27,709.13) 2707.92,701.48 2707.92,682.08 2710,680 v1(2710,486)
USHIELD: L1.2 X2.P$1 X2.P$2 Z1.2 Z2.2 | length 956.9
  Top Layer w10: Z2.2 1830.55,1694.92 1830.55,1705.85 1850,1725.3 1850,1829.37 Z1.2 1856,1864.37 1857.06,1863.31 L1.2 1956.37,1863.31 X2.P$2@2047.99,1771.69
  Bottom Layer w10: X2.P$2 X2.P$1
VIN: D1.C PC1.+ POWER.8 RN1.8 U1.3 | length 1917.4
  Top Layer w10: U1.3 U1.3@1351,1645.51 ; v1(1352,1184) 1352,1438.61 D1.C 1351,1565.61 U1.3@1351,1645.51 ; RN1.8 1847.76,1541 1795,1541 1760,1576 1605,1576 PC1.+ U1.3@1351,1645.51
  Bottom Layer w10: POWER.8 1065,895 1055,905 1000,905 978,927 978,976 1000,998 1166,998 v1(1352,1184)
XT1: ?.1 C9.1 R1.1 Y1.2 | length 3361.9
  Top Layer w10: C9.1 425,445 450,420 R1.1 450,297 465,282 Y1.2 ; ?.1 2794,1004.76 2794,867 v1(2811,850)
  Bottom Layer w10: Y1.2 540,120 2454,120 2811,477 v1(2811,850)
XT2: ?.2 C11.1 R1.2 Y1.1 | length 4418.2
  Top Layer w10: C11.1 545,447 520,422 R1.2 625,385 v1(655,355) ; Y1.1 725,195 822.35,292.35 v1(822.35,320) ; v1(2732,1036) 2732.26,1036.26 ?.2
  Bottom Layer w10: v1(655,355) 690,320 v1(822.35,320) ; Y1.1 617,243 440,243 417,220 417,159 501,75 2560,75 2905,420 2905,863 v1(2732,1036)
XTAL1: R2.1 Y2.3 ZU4.9 | length 983.6
  Top Layer w10: Y2.3 506.26,1631.74 526,1612 774,1612 950,1436 950,1280 975,1255 ZU4.9 1102,1255 1112,1245 R2.1
XTAL2: R2.2 Y2.1 ZU4.10 | length 926.3
  Top Layer w10: Y2.1 585,1705 840,1705 975,1570 975,1370 990,1355 ZU4.10 1180,1355 1190,1345 R2.2
XUSB: F1.2 X2.1 | length 1574.8
  Top Layer w10: v1(2726,1590) 2787,1651 2787,1806 2901,1920 2981,1920 3040,1861 3040,1441.77 F1.2
  Bottom Layer w10: 2235,1586.26 2235,1550 2248,1537 2471.86,1537 2524.86,1590 v1(2726,1590)
pads on no net: ?.5 ?.6 ?.7 ?.12 ?.14 ?.22 ?.23 ?.25 ?.26 POWER.1 RESET.5 RN3.2 RN3.3 RN3.6 RN3.7 U2.4

## Text inside footprints (layer, text, board x,y; h text height)
U1: Mechanical 7 "3" at 1300.19,1610 h27.2; Mechanical 7 "4" at 1335,1880 h27.2; Mechanical 7 "1" at 1124.07,1610 h27.2; Mechanical 7 "2" at 1209.19,1609.63 h27.2
U$1: Top Layer "ARDUINO is a registered trademark." at 8530,-225 h56.1 r90; Top Layer "The product information on the Web Site or Materials is subject to change without notice. Do not finalize a design with this information." at 8410,-225 h42.5 r90; Top Layer "these for future definition and shall have no responsibility whatsoever for conflicts or incompatibilities arising from future changes to them." at 8290,-225 h42.5 r90; Top Layer "rely on the absence or characteristics of any features or instructions marked \"reserved\" or \"undefined.\" Arduino reserves" at 8210,-225 h42.5 r90; Top Layer "Arduino may make changes to specifications and product descriptions at any time, without notice. The Customer must not" at 8130,-225 h42.5 r90; Top Layer "REGARDING PRODUCTS, INCLUDING BUT NOT LIMITED TO, ANY IMPLIED WARRANTIES OF MERCHANTABILITY OR FITNESS FOR A PARTICULAR PURPOSE" at 8010,-225 h42.5 r90; Top Layer "Reference Designs ARE PROVIDED \"AS IS\" AND \"WITH ALL FAULTS. Arduino DISCLAIMS ALL OTHER WARRANTIES, EXPRESS OR IMPLIED," at 7930,-225 h42.5 r90